# EAGLE board avip-mod v2 (EAGLE 8.2.1)
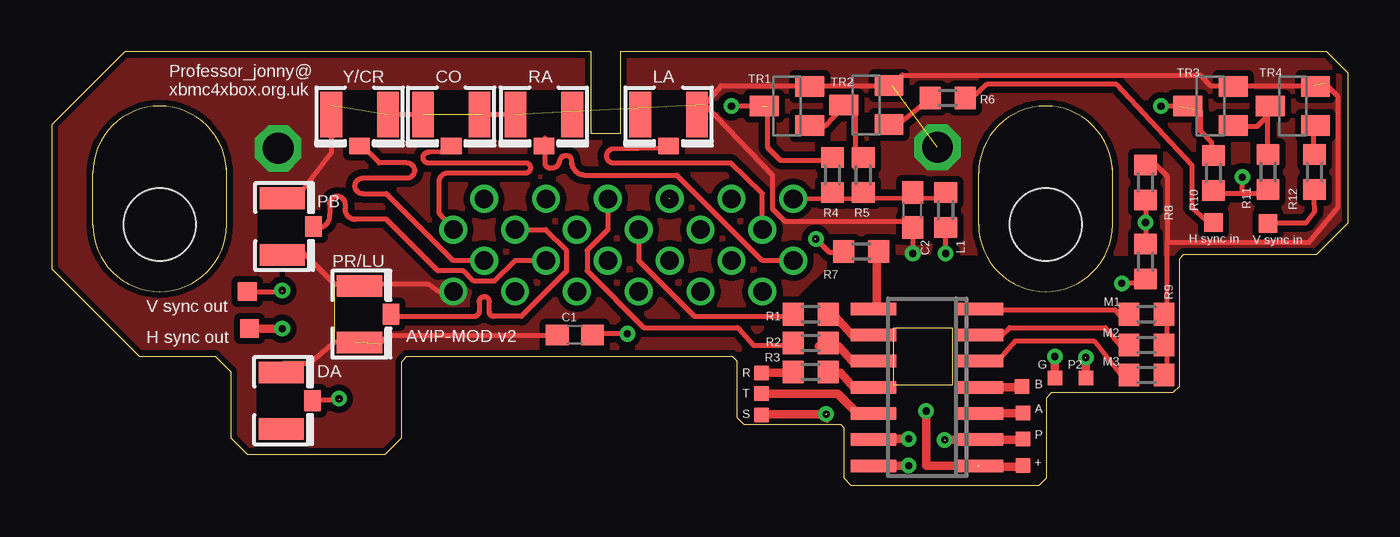
[diagram p0: board, top side]
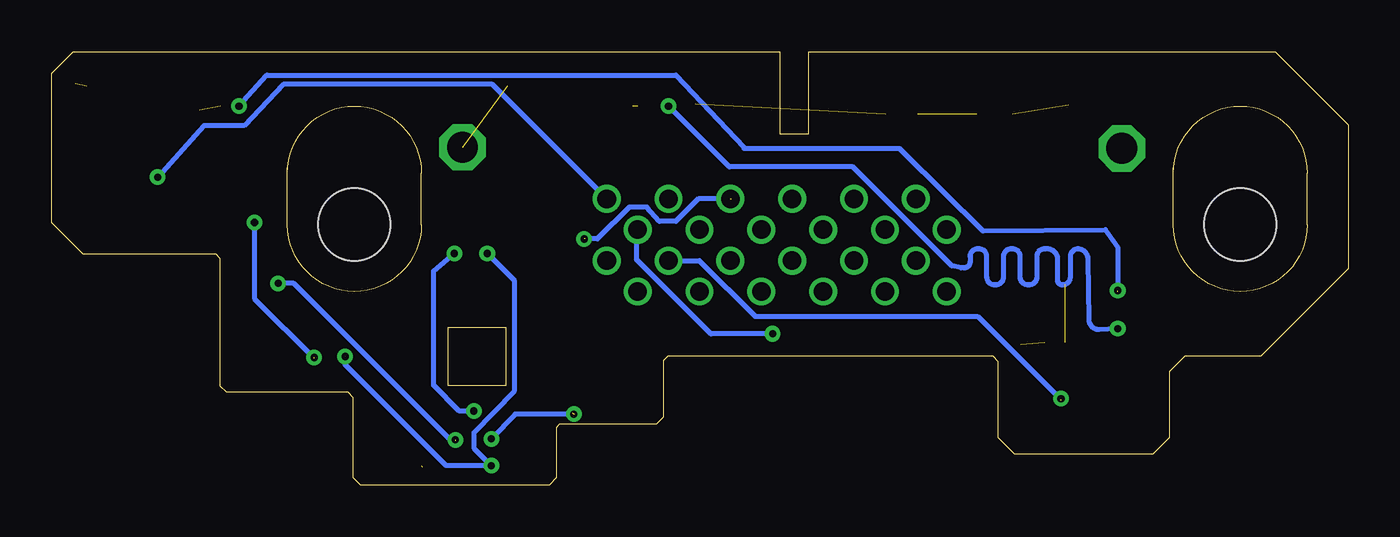
[diagram p1: board, bottom side, seen from below]

Size 62.95 x 21.05 mm. Coordinates in mm from the lower left corner, seen from the top.
Outline: 8.5,15.15 arc180 2,15.15 2,12.65 arc180 8.5,12.65 8.5,15.4
Outline: 51.5,15.15 arc180 45,15.15 45,12.65 arc180 51.5,12.65 51.5,15.4
Outline: 40.87,7.64 43.71,7.64 43.71,4.85 40.87,4.85 40.87,7.64
Outline: 33.05,6.25 33.25,6.05 33.25,3.3 33.6,2.95 38.3,2.95 38.45,2.8 38.45,0.35 38.8,0 47.95,0 48.3,0.35 48.3,4.25 48.55,4.5 54.45,4.5 54.75,4.8 54.75,11 54.95,11.2 61.4,11.2 62.95,12.75 62.95,20 61.9,21.05 27.6,21.05 27.6,17.05 26.2,17.05 26.2,21.05 3.55,21.05 0,17.5 0,10.5 4.25,6.25 7.95,6.25 8.7,5.5 8.7,2.3 9.5,1.5 16.2,1.5 17,2.3 17,6 17.25,6.25 33.05,6.25
Copper layers (1*16): Top 0.035mm / dielectric 1.5mm / Bottom 0.035mm
Design rules "default *": minimum track width 10mil, minimum drill 24mil, track to track 8mil, track to pad 8mil, pad to pad 8mil, via to via 8mil, smd to smd 8mil, copper to edge 8mil, drill to drill 8mil, minimum pad ring 10mil, minimum via ring 8mil, stop-mask expansion 4mil, vias tented up to drill 0.35mm, thermal gap 10mil
Net classes: 0 standard: width 0.25 mm, clearance 0.205 mm; 1 video length: width 0.006 mm, clearance 0.205 mm to class 0, clearance 0.205 mm
Holes 3.5 mm at 5.25,12.65 48.25,12.65
tRestrict: area 2.2,9.7 to 8.2,18.1; area 45.2,9.7 to 51.2,18.1
Milling: 48 lines

## Footprints (pad centres in the part's own frame; a part is rotated, then mirrored left to right if it is on the bottom)
C0603 = smd 1.1 x 1: 1 -0.85,0; 2 0.85,0
U.FL = smd 2.2 x 1.05: 1 0,1.375; 2 0,-1.375 | smd 0.8 x 1: 3 1.525,0
TP07SQ = smd 0.7 x 0.7: TP 0,0
SO-14 = smd 0.6 x 2.2: 1 -3.81,-2.6; 2 -2.54,-2.6; 3 -1.27,-2.6; 4 0,-2.6; 5 1.27,-2.6; 6 2.54,-2.6; 7 3.81,-2.6; 8 3.81,2.6; 9 2.54,2.6; 10 1.27,2.6; 11 0,2.6; 12 -1.27,2.6; 13 -2.54,2.6; 14 -3.81,2.6
TP09SQ = smd 0.9 x 0.9: TP 0,0
R0603 = smd 1 x 1.1: 1 -0.85,0; 2 0.85,0
SOT23-BCE = smd 1 x 1.4: B -0.95,-1.1; C 0.95,-1.1; E 0,1.1

## Placement (x,y rotation side)
C1  [C0603]  25.4,7.3 0 top
C2  [C0603]  41.8,13.35 90 top
CO  [U.FL]  19.4,18 270 top
DA  [U.FL]  11.15,4.1 0 top
E$2  [TP07SQ]  34.45,5.45 0 top
E$3  [TP07SQ]  34.45,4.45 0 top
E$4  [TP07SQ]  47.15,0.95 0 top
E$5  [TP07SQ]  34.45,3.4 0 top
E$6  [SO-14]  42.5,4.75 90 top
E$7  [TP09SQ]  56.4,12.75 180 top
E$8  [TP07SQ]  47.1,4.8 0 top
E$9  [TP07SQ]  47.15,3.5 0 top
E$10  [TP07SQ]  47.15,2.25 0 top
E$14  [TP09SQ]  59.05,12.7 180 top
E$15  [TP07SQ]  50.2,5.2 0 top
GROUND  [TP07SQ]  48.7,5.2 0 top
H_SYNC_OUT  [TP09SQ]  9.6,7.6 180 top
L1  [R0603]  43.4,13.35 270 top
LA  [U.FL]  29.95,18 270 top
M1  [R0603]  53.15,8.3 180 top
M2  [R0603]  53.15,6.8 180 top
M3  [R0603]  53.15,5.35 180 top
PB  [U.FL]  11.2,12.55 0 top
PR/LU  [U.FL]  14.95,8.3 0 top
R1  [R0603]  36.85,8.3 0 top
R2  [R0603]  36.85,6.9 0 top
R3  [R0603]  36.85,5.5 0 top
R4  [R0603]  37.9,15.05 90 top
R5  [R0603]  39.4,15.05 90 top
R6  [R0603]  43.5,18.8 0 top
R7  [R0603]  39.3,11.35 180 top
R8  [R0603]  53.1,14.7 270 top
R9  [R0603]  53.1,10.85 270 top
R10  [R0603]  56.4,15.15 270 top
R11  [R0603]  59.05,15.2 270 top
R12  [R0603]  61.3,15.2 270 top
RA  [U.FL]  23.9,18 270 top
TR1  [SOT23-BCE]  35.7,18.4 90 top
TR2  [SOT23-BCE]  39.55,18.45 90 top
TR3  [SOT23-BCE]  56.25,18.4 90 top
TR4  [SOT23-BCE]  60.25,18.4 90 top
V_SYNC_OUT  [TP09SQ]  9.5,9.4 180 top
Y/CR  [U.FL]  14.95,18 270 top

## Library data of the parts
C1 C2 L1 M1-M3 R1-R12 = eagle-ltspice
CO DA LA PB PR/LU RA Y/CR = adafruit
E$2-E$5 E$8-E$10 E$15 GROUND = testpad2
E$6 = microchip1
E$7 E$14 H_SYNC_OUT V_SYNC_OUT = testpad1
TR1-TR4 = ref-packages

## Nets
H_SYNC_IN: E$7.TP
H_SYNC_OUT: H_SYNC_OUT.TP
RING: E$15.TP
V_SYNC_OUT: V_SYNC_OUT.TP

## Tracks (layer width: path | path; a pad name or v marks a point on that pad's centre or on a via)
+5V  (via drill 0.35, 0.9 pad 0.81)
  Top 0.254: v36,13.9 43.45,13.95 | 57.8,14.15 v57.8,14.95 | 59,14.15 57.8,14.15 | 57.8,14.15 57,14.15
  Bottom 0.254: v36,13.9 41.55,19.45 51.7,19.45 53.6,17.45 55.55,17.45 v57.8,14.95
A
  Top 0.406: 45.3,3.5 47.05,3.5
AUDIO_LEFT_OUTPUT  (via drill 0.9 pad 0.81)
  Top 0.254: v36,10.9 34.5,10.9 30.35,15.05 25.85,15.05 arc-90 25.25,15.75 arc90 25,16 arc90 24.65,15.7 arc-90 24.25,15.4 arc-90 23.95,15.6 23.95,16.85
AUDIO_LEFT_OUTPUT_GROUND  (via drill 0.9 pad 0.81)
  other vias: 33,13.9
AUDIO_RIGHT_OUTPUT  (via drill 0.9 pad 0.81)
  Top 0.254: v34.5,12.4 34.5,14.15 32.95,15.65 27.2,15.65 arc-143 27.15,16.3 29.85,16.35
AUDIO_RIGHT_OUTPUT_FILTER  (via drill 0.35)
  Top 0.254: v27.95,7.35 26.5,7.35
  Bottom 0.152: 34.55,12.35 34.45,12.45
  Bottom 0.254: 34.55,12.35 34.55,10.95 30.95,7.35 v27.95,7.35
AUDIO_RIGHT_OUTPUT_GROUND  (via drill 0.9 pad 0.25)
  other vias: 34.5,9.4
B
  Top 0.406: 44.9,4.75 47.15,4.75
COMPONENT_PB_GROUND  (via drill 0.9 pad 0.81)
  other vias: 25.5,9.4
COMPONENT_PB_OUTPUT  (via drill 0.9 pad 0.81)
  Top 0.254: v24,10.9 22.5,10.9 21.5,9.9 20.5,9.9 20,10.4 18.75,10.4 16.25,12.9 14.75,12.9 arc-90 14.25,13.4 14.25,13.65 arc180 13.5,13.65 13.5,13.15 arc-90 13,12.5
COMPONENT_PR_GROUND  (via drill 0.9 pad 0.81)
  other vias: 24,13.9
COMPONENT_PR_OUTPUT  (via drill 0.9 pad 0.81)
  Top 0.254: v22.5,12.4 24,12.4 25,11.4 25,10.4 22.8,8.2 21.45,8.2 arc-90 21.25,8.4 21.25,8.9 arc90 21,9.15 arc90 20.75,8.9 20.75,8.4 arc-90 20.55,8.2 16.75,8.2
COMPONENT_Y_GROUND  (via drill 0.9 pad 0.81)
  other vias: 22.5,9.4
COMPONENT_Y_OUTPUT  (via drill 0.9 pad 0.81)
  Top 0.254: v21,10.9 19.5,10.9 16.25,14.15 15.1,14.15 arc-180 15.1,14.9 17.25,14.9 arc180 17.25,15.65 15.9,15.65 14.9,16.65
COMPOSITE_GROUND  (via drill 0.9 pad 0.81)
  other vias: 21,13.9
COMPOSITE_OUTPUT  (via drill 0.9 pad 0.81)
  Top 0.254: 19.45,16.2 18.3,16.15 arc180 18.25,15.65 23,15.65 arc-180 23,15.15 19.25,15.15 arc90 18.8,14.7 18.8,13.2 v19.5,12.4
DIGITAL_AUDIO_OUTPUT  (1 unrouted)
  Top 0.254: 12.75,4.15 14,4.15
  Bottom 0.254: 13.95,4.15 18,8.2 28.8,8.2 31.5,10.9 33,10.9
GROUND  (via drill 0.35, 0.9 pad 0.81, 1.5)  (8 unrouted)
  Top 0.254: 61.25,19.4 56.25,19.4 55.75,19.9 41.3,19.9 40.8,19.4 32.5,19.4 31.7,18.5 35,15.05 35,13.4 35.6,12.8 41.8,12.8 v41.8,11.25 | 54.15,5 54.15,11.8 | 54.15,11.8 61.05,11.8 62.45,13.5 62.45,18.85 61.8,19.5 | 20.9,18 22.45,18 | 16.3,18 18.05,18 | 13.6,18.45 13.6,16.15 12.25,14.4 | v19.5,9.4 18.8,9.4 18.3,9.75 13.75,9.75 12.2,11.3 | 24.35,7.25 16.3,7.25 15.9,6.85 | 14.75,6.95 13.75,6.95 12.5,5.9 11.25,5.9 | 53.4,15.75 54.15,15 54.15,11.8
  Top 0.406: v41.6,0.95 40.65,0.95 | 48.7,5.25 48.7,6.25
  Bottom 0.254: v41.8,11.25 40.5,9.95 40.5,4.55 42.45,2.55 42.45,1.8 v41.6,0.95 43.8,0.95 48.7,5.85 48.7,6.25
  other vias: 11,16.35 43,16.4
  pour Top (isolate 0.305): 0,17.5 0,10.5 4.23,6.25 7.93,6.23 8.7,5.5 8.74,2.29 9.5,1.52 16.26,1.52 17,2.32 17.01,5.98 17.29,6.25 33.07,6.26 38.25,11.3 61.4,11.2 62.95,12.8 62.95,19.95 61.95,21.05 27.6,21.05 27.6,17.05 26.2,17.05 26.2,21.05 3.55,21
H_SYNC_IN
  Top 0.254: E$7.TP 56.05,12.85 55.35,13.5 55.35,15.55 51.7,19.45 45.4,19.45 44.65,18.75
H_SYNC_OUT  (via drill 0.35)  (1 unrouted)
  Top 0.254: 34.5,18.4 v33,18.4 | 34.75,18.4 34.75,16.4 35.4,15.75 37.8,15.75
  Top 0.406: v11.2,7.6 H_SYNC_OUT.TP
  Bottom 0.254: v11.2,7.6 12.11,7.55 arc90 12.59,8.03 12.64,10.95 arc-90 13.12,11.48 | 13.12,11.48 13.12,11.48 arc0 13.12,11.48 | 13.12,11.48 arc-90 13.5,11.1 13.5,10.11 arc90 13.88,9.72 13.93,9.72 arc90 14.11,10.01 14.11,11 arc-90 14.7,11.48 14.74,11.48 arc-90 15.12,11.1 15.12,10.11 arc90 15.51,9.72 15.55,9.72 arc90 15.94,10.11 15.94,11.1 arc-90 16.32,11.48 16.37,11.48 arc-90 16.75,11.1 16.75,10.11 arc90 17.13,9.72 17.18,9.72 arc90 17.56,10.11 17.56,11.1 arc-90 17.94,11.48 17.99,11.48 arc-90 18.37,11.1 18.37,10.83 arc90 18.65,10.55 18.8,10.55 19.25,10.65 24.05,15.45 30.05,15.45 v33,18.4
H_SYNC_PULLUP
  Top 0.254: 37.5,17.4 38.45,18.4 39,18.4 39,15.4
M1
  Top 0.254: 51.9,8.2 51.65,8.5 45.2,8.5
M2
  Top 0.254: 46.15,7.3 46.5,7.65 51.15,7.65 51.85,6.8
M3
  Top 0.254: 45.95,6.1 46,6.1 46.8,7 50.6,7 51.9,5.35
MODE_1  (via drill 0.35, 0.9 pad 0.81)  (2 unrouted)
  Bottom 0.254: 37.05,11.95 36.45,11.95 34.9,13.5 34.05,13.5 33.45,12.8 32.65,12.8 31.55,13.9 29.95,13.9
  other vias: 37.1,11.95 30,13.9
MODE_1_GROUND  (via drill 0.9 pad 0.81)
  other vias: 30,10.9
MODE_1_PROTECTED
  Top 0.406: 40.05,11.4 40.05,8.5
MODE_2  (via drill 0.9 pad 0.81)
  Top 0.254: v28.5,12.4 28.5,10.9 31.2,8.2 36.05,8.2
MODE_2_GROUND  (via drill 0.9 pad 0.81)
  other vias: 28.5,9.4
MODE_2_PROTECTED
  Top 0.406: 38.9,7.25 38,8.25 37.4,8.25
MODE_3  (via drill 0.9 pad 0.81)
  Top 0.254: v27,13.9 27,12.4 26,11.4 26,10.4 28.75,7.65 33.3,7.65 34.05,6.8 36.05,6.8
MODE_3_GROUND  (via drill 0.9 pad 0.81)
  other vias: 27,10.9
MODE_3_PROTECTED
  Top 0.406: 38.9,6 38.2,6.75
PROG_RUN  (via drill 0.35)  (1 unrouted)
  Top 0.254: 53,9.8 v51.95,9.8
  Top 0.406: 43.35,2.2 46.95,2.2
  Bottom 0.254: 43.35,2.15 43.55,2.15 51.2,9.8 v51.95,9.8
RESET
  Top 0.406: 37.4,5.45 38.3,5.45 38.95,4.7
RING  (via drill 0.35)  (1 unrouted)
  Top 0.406: E$15.TP v50.2,6.2
  Bottom 0.254: 53.1,12.7 53.1,9.05 50.2,6.15
S$1
  Top 0.254: 57,17.4 58.5,17.4 59,17.9 | 59,18.4 59,17.9 | 59,17.9 59,16.15
S$2  (via drill 0.35)
  Top 0.254: 53.1,13.95 v53.1,12.75 53.1,11.6
S$3
  Top 0.254: 61.25,17.35 61.25,16.15
S$4
  Top 0.254: 41.25,17.65 42.5,18.65
S$5  (via drill 0.35)
  other vias: 48.7,6.25
S$6  (via drill 0.35)
  other vias: 13.95,4.2
S$9
  Top 0.254: 12.5,12.9 12.75,12.65
S$15
  Top 0.406: 35.9,5.45 34.6,5.45
S$17  (via drill 0.9 pad 0.81)
  other vias: 31.5,12.4
S$18  (via drill 0.9 pad 0.81)
  other vias: 33,10.9
S$19  (via drill 0.9 pad 0.81)
  other vias: 25.5,12.4
S$21
  Top 0.406: 38.15,4.45 39.05,3.55
S$29  (via drill 0.9 pad 0.81)
  other vias: 31.5,9.4
S$33
  Top 0.254: 37.1,11.95 37.75,11.3 38.55,11.3
S$37  (via drill 0.35)
  other vias: 43.35,2.2
S$41
  Top 0.406: 38.2,6.75 37.25,6.75
SPEAK  (via drill 0.35)  (2 unrouted)
  Top 0.254: 37.65,3.15 37.65,3.5
  Top 0.406: v41.6,2.25 40.7,2.25 | 34.6,3.45 37.55,3.45
  Bottom 0.254: v41.6,2.25 40.45,3.45 v37.6,3.45
TOGGLE
  Top 0.406: 34.55,4.45 38.15,4.45
V_SYNC_IN
  Top 0.254: 58.95,12.75 60.9,12.75 61.3,13.25 61.25,14.6
V_SYNC_OUT  (via drill 0.35)  (2 unrouted)
  Top 0.254: 54.75,18.4 v53.85,18.4 | V_SYNC_OUT.TP 11.2,9.4 | 55.75,18.2 55.75,17.2 56.3,16.65 56.3,16.05
  Bottom 0.254: v53.85,18.4 52.5,19.9 32.65,19.9 29.35,16.4 29.35,16.35 21.8,16.35 21.6,16.15 17.75,12.35 11.8,12.4 11.2,11.55 v11.2,9.45
VCC  (via drill 0.35)  (1 unrouted)
  Top 0.254: v43.4,11.25 43.4,12.5
  Top 0.406: 44.95,0.9 47.2,0.9 | v42.45,3.6 42.45,0.95 45,0.95
  Bottom 0.254: v43.4,11.25 44.4,10.4 44.4,4.85 43.15,3.6 v42.45,3.6

## Text on the board
tNames: Professor_jonny@ / xbmc4xbox.org.uk | H sync in | V sync in | V sync out | H sync out | AVIP-MOD v2 | R | G | P2 | T | B | S | A | P | +
200bmp: C:/Users/professor_jonny/Desktop/avip2.bmp